# Altium PCB PROB 6.PcbDoc
Units mil, origin at the board's own origin, x right, y up, seen from the top; angles counter-clockwise.
Board outline 3545 x 2415 mil, 2 copper layers (Top Layer, Bottom Layer); 15 components, 12 nets, 37 pads, 14 vias.
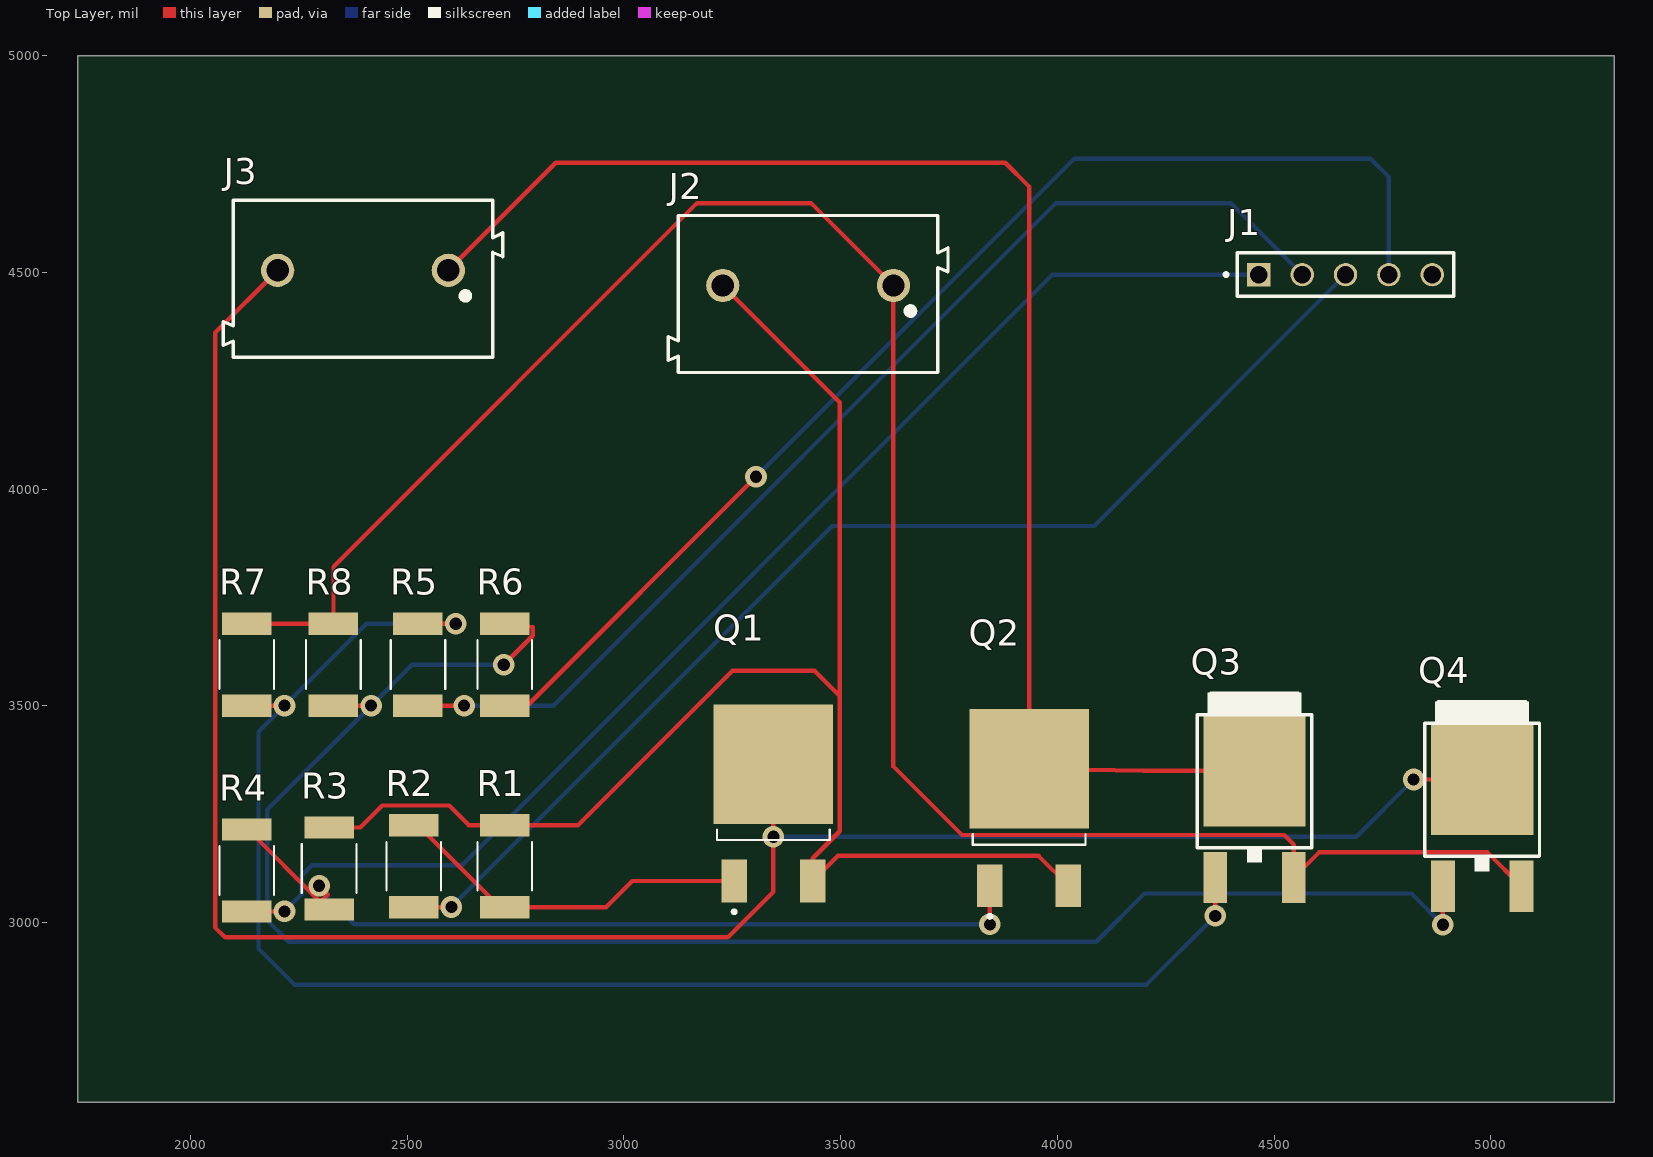
[diagram p0: Top Layer view]
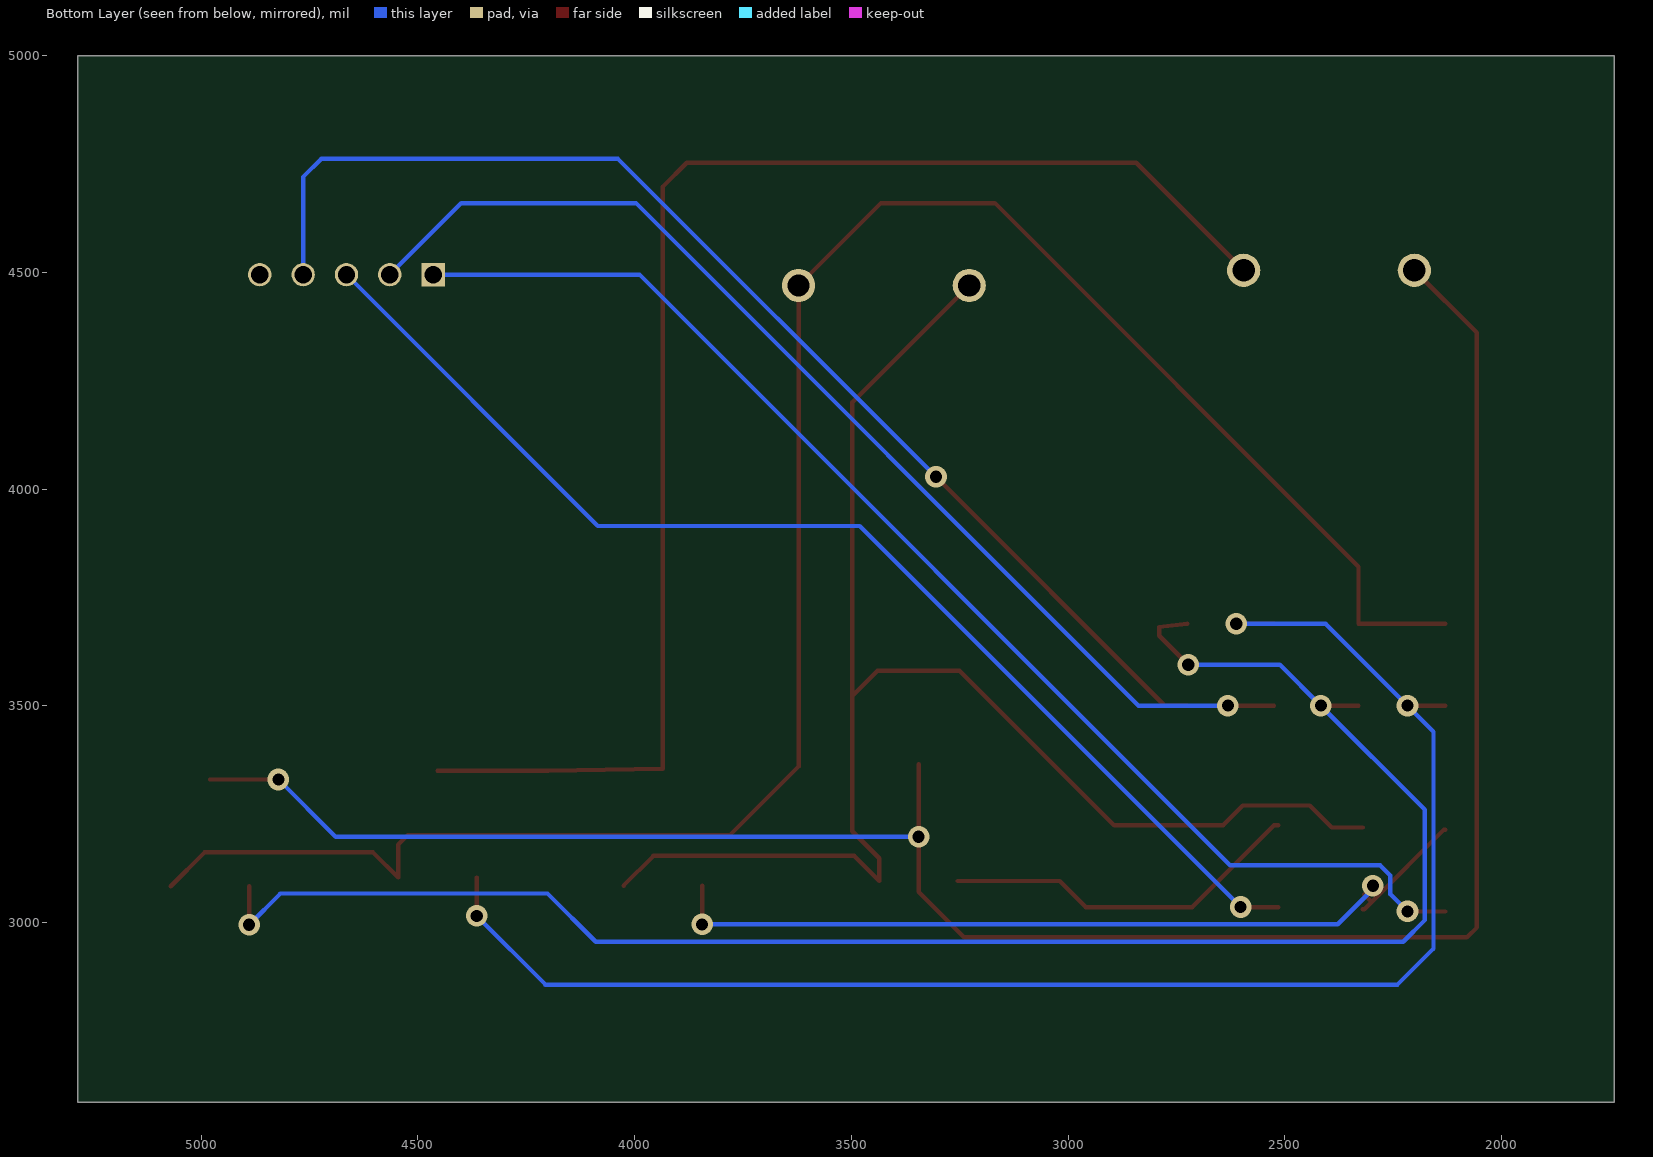
[diagram p1: Bottom Layer view, seen from below]

## Layer stack, top to bottom
Top Solder: solder mask 0.4, Solder Resist, Dk 3.5
Top Layer: signal copper 1.4
Dielectric 1: dielectric 12.6, FR-4, Dk 4.8
Bottom Layer: signal copper 1.4
Bottom Solder: solder mask 0.4, Solder Resist, Dk 3.5

## Board outline
1740,2585 5285,2585 5285,5000 1740,5000

## Design rules (kind name [scope] priority, off if disabled: settings)
Clearance [All] p1: gap=10 ignorepadtopadclearanceinfootprint=FALSE
PolygonConnect [All] p1: connectstyle=Relief reliefconductorwidth=10 reliefentries=4 polygonreliefangle="90 Angle" airgapwidth=10
RoutingVias [All] p1: holewidth=28 width=50 viastyle="Through Hole" minholewidth=28 minwidth=50 maxholewidth=28 maxwidth=50
SolderMaskExpansion [All] p1: expansion=4 istentingtop=FALSE
SupplyNets "Schematic Supply Nets" [InNet('GND')] p1: voltage=0.000
Width [All] p1: maxlimit=10 minlimit=10 preferedwidth=10
30 further rules are at their usual default settings.

## Components (designator, comment, footprint, x,y, rotation, side; value= is the part's Value field where it differs from the comment)
J1 "MTSW-105-09-G-S-530" SAMTEC_MTSW-105-09-G-S-530 4665,4495 r180 top
J2 "691101810002" 691101810002 3425,4470 r180 top
J3 "691101810002" 691101810002 2398.15,4505 r180 top
Q1 "DI068P04D1" TRANS_DI068P04D1 3345,3275 r90 top
Q2 "DI068P04D1" TRANS_DI068P04D1 3935,3264.45 r90 top
Q3 "IPD122N10N3G" TO252-DPAK 4455,3350 r0 top
Q4 "IPD122N10N3G" TO252-DPAK 4980,3330 r0 top
R1 "ERJU12F1300U" RES_ERJU12F1300U 2725,3130 r90 top
R2 "ERJU12F1300U" RES_ERJU12F1300U 2515,3130 r90 top
R3 "ERJU12F1300U" RES_ERJU12F1300U 2320,3125 r90 top
R4 "ERJU12F1300U" RES_ERJU12F1300U 2130,3120 r90 top
R5 "ERJU12F1300U" RES_ERJU12F1300U 2525,3595 r90 top
R6 "ERJU12F1300U" RES_ERJU12F1300U 2725,3595 r90 top
R7 "ERJU12F1300U" RES_ERJU12F1300U 2130,3595 r90 top
R8 "ERJU12F1300U" RES_ERJU12F1300U 2330,3595 r90 top

## Footprints (in the part's own frame and the unit in brackets; to place one, negate y for a bottom-side part, rotate by r counter-clockwise, add the part's x,y. Pads: shape width x height; smd on the part's side, far side on the other; paste and mask are expansions set on the pad)
691101810002 [mm]
  round 1.95 hole 1.3: 1(-5,0) 2(5,0)
  silkscreen extent -8.2,-4.1 8.2,5.1
RES_ERJU12F1300U [mm]
  rect 1.3x2.9 smd: 1(-2.4,0) 2(2.4,0)
  silkscreen extent -1.43,-1.6 1.43,1.6
SAMTEC_MTSW-105-09-G-S-530 [mm]
  rect 1.37x1.37 / inner round 1.37 / far side rect 1.37x1.37 hole 1.02: 01(5.08,0)
  round 1.37 hole 1.02: 02(2.54,0) 03(0,0) 04(-2.54,0) 05(-5.08,0)
  silkscreen extent -6.35,-1.27 7.1,1.27
TO252-DPAK [mm]
  rect 1.4x3 smd: 1(-2.3,-6.25) 3(2.3,-6.25)
  rect 6x6.5 smd: 2(0,0)
  silkscreen extent -3.36,-5.36 3.36,4.57, body extent -3.25,-5.83 3.25,4.15, height 1.25
TRANS_DI068P04D1 [mm]
  rect 2.5x1.5 smd: 1(-4.55,2.3) 3(-4.55,-2.3)
  rect 7x7 smd paste-2.76: 4(2.3,0)
  silkscreen extent -6.45,-3.3 -1.52,3.3, body extent -1,-2.3 8.75,0.09, height 6.6

## Part data
J1 Q1 Q2 R1 R2 R3 R4 R5 R6 R7 R8: Package=None, Availability=Unavailable, Price=None
  J1: MP=MTSW-105-09-G-S-530
  Q1 Q2: MP=DI068P04D1
  R1 R2 R3 R4 R5 R6 R7 R8: MP=ERJU12F1300U
J2 J3: "Serie 1018 - 10.0mm pitch - Modular THT - Blue - Horizontal cable entry Wire Protector 12.6mm height - 02p", Package=None, Check_prices=https://www.snapeda.com/parts/691101810002/Wurth+Elektronik/view-part/?ref=eda, MF="Wurth Elektronik", MP=691101810002, SnapEDA_Link=https://www.snapeda.com/parts/691101810002/Wurth+Elektronik/view-part/?ref=snap
Q3 Q4: "MOSFET Transistor, N Channel, 59 A, 100 V, 0.0105 ohm, 10 V, 2.7 V", Package="TO-252-3 Infineon", Check_prices=https://www.snapeda.com/parts/IPD122N10N3%20G/Infineon/view-part/?ref=eda, MF=Infineon, MP="IPD122N10N3 G", SnapEDA_Link=https://www.snapeda.com/parts/IPD122N10N3%20G/Infineon/view-part/?ref=snap

## Via types
v1: diameter 50, hole 28, Top Layer to Bottom Layer, 14 vias

## Nets (pads, with @x,y where several pads share a name; then routed paths per layer and width w, separated by ;. In a path a pad name is that pad's centre, name@x,y a point inside that pad or via, vN(x,y) a via of type N, cw(c..) or ccw(c..) an arc to the next point about the centre after c; other vN are vias at no path point)
GND: J2.1 Q3.3 Q4.3 R7.2 R8.2 | length 4815.2
  Top Layer w10: R7.2 R8.2 2330,3821 3169,4660 3431.85,4660 J2.1 3621.85,3360.15 3780,3202 4523.55,3202 4545.55,3180 Q3.3 4603.61,3162 4992.49,3162 Q4.3
NetJ1_01: J1.01 R4.1 | length 2968.9
  Top Layer w10: R4.1 2216.51,3025.51 v1(2217,3026)
  Bottom Layer w10: v1(2217,3026) 2256.75,3065.75 2256.75,3108.77 2280,3132.02 2626.02,3132.02 3989,4495 J1.01
NetJ1_02: J1.02 R5.1 | length 2588.6
  Top Layer w10: R5.1 v1(2631.51,3500.51)
  Bottom Layer w10: v1(2631.51,3500.51) 2837.51,3500.51 3997,4660 4400,4660 J1.02
NetJ1_03: J1.03 R2.1 | length 2754.5
  Top Layer w10: R2.1 2601.51,3035.51 v1(2602,3036)
  Bottom Layer w10: v1(2602,3036) 3481,3915 4085,3915 J1.03
NetJ1_04: J1.04 R6.1 | length 2804.9
  Top Layer w10: R6.1 2777,3500.51 v1(3305,4028.51)
  Bottom Layer w10: v1(3305,4028.51) 4038.49,4762 4723,4762 4765,4720 J1.04
NetJ2_2: J2.2 Q1.3 Q2.3 R1.2 R3.2 | length 3543.8
  Top Layer w10: R3.2 2392,3219.49 2442.51,3270 2597,3270 2642.51,3224.49 R1.2 2894,3224.49 3250.51,3581 3440,3581 3498,3523 ; J2.2 3498,4200.15 3498,3523 ; Q2.3 3956.87,3154 3493.69,3154 Q1.3 3435.55,3148.55 3498,3211 3498,3523
NetJ3_1: J3.1 Q2.4 Q3.2 | length 3328.6
  Top Layer w10: J3.1 2843,4753 3880,4753 3935,4698 Q2.4 4200,3350 Q3.2
NetJ3_2: J3.2 Q1.4 Q4.2 | length 4901
  Top Layer w10: J3.2 2057,4360.7 2057,2989 2080,2966 3240,2966 3345,3071 v1(3345,3198) Q1.4 ; v1(4822,3330) Q4.2
  Bottom Layer w10: v1(3345,3198) 4690,3198 v1(4822,3330)
NetQ1_1: Q1.1 R1.1 R2.2 | length 842.7
  Top Layer w10: R2.2 2525,3224.49 2713.98,3035.51 R1.1 2959,3035.51 3019.35,3095.87 Q1.1
NetQ2_1: Q2.1 R3.1 R4.2 | length 1997.2
  Top Layer w10: R4.2 2133,3214.49 R3.1@2299.74,3047.74 ; v1(2297,3085) 2317,3065 R3.1@2299.74,3047.74 ; R3.1 2316.98,3030.51 R3.1@2299.74,3047.74 ; v1(3844.45,2996) Q2.1
  Bottom Layer w10: v1(2297,3085) 2297,3077 2378,2996 v1(3844.45,2996)
NetQ3_1: Q3.1 R5.2 R7.1 | length 3628.8
  Top Layer w10: R7.1 v1(2217,3500.51) ; R5.2 v1(2612.09,3689.49) ; v1(4364.45,3015.45) Q3.1
  Bottom Layer w10: v1(2612.09,3689.49) 2405.98,3689.49 v1(2217,3500.51) 2157,3440.51 2157,2940 2240,2857 4206,2857 v1(4364.45,3015.45)
NetQ4_1: Q4.1 R6.2 R8.1 | length 4104.1
  Top Layer w10: R8.1 v1(2417,3500.51) ; v1(2723,3595) 2790,3662 2790,3682 R6.2 ; v1(4889.45,2995) Q4.1
  Bottom Layer w10: v1(2723,3595) 2511.49,3595 v1(2417,3500.51) 2177,3260.51 2177,3006 2227,2956 4090,2956 4201,3067 4817.45,3067 v1(4889.45,2995)
pads on no net: J1.05

## Other copper
Multi-Layer:
  text "SUPPLY" at 3260,4870 h60
  text "+     -" at 3210,4780 h60
  text "MOTOR" at 2255,4760 h60